# Altium PCB UWB-Anchor_Pcb.PcbDoc
Units mil, origin at the board's own origin, x right, y up, seen from the top; angles counter-clockwise.
Board outline 1732.28 x 1574.8 mil, 2 copper layers (Top Layer, Bottom Layer), stack 49.606 mil thick; 40 components, 51 nets, 199 pads, 125 vias.
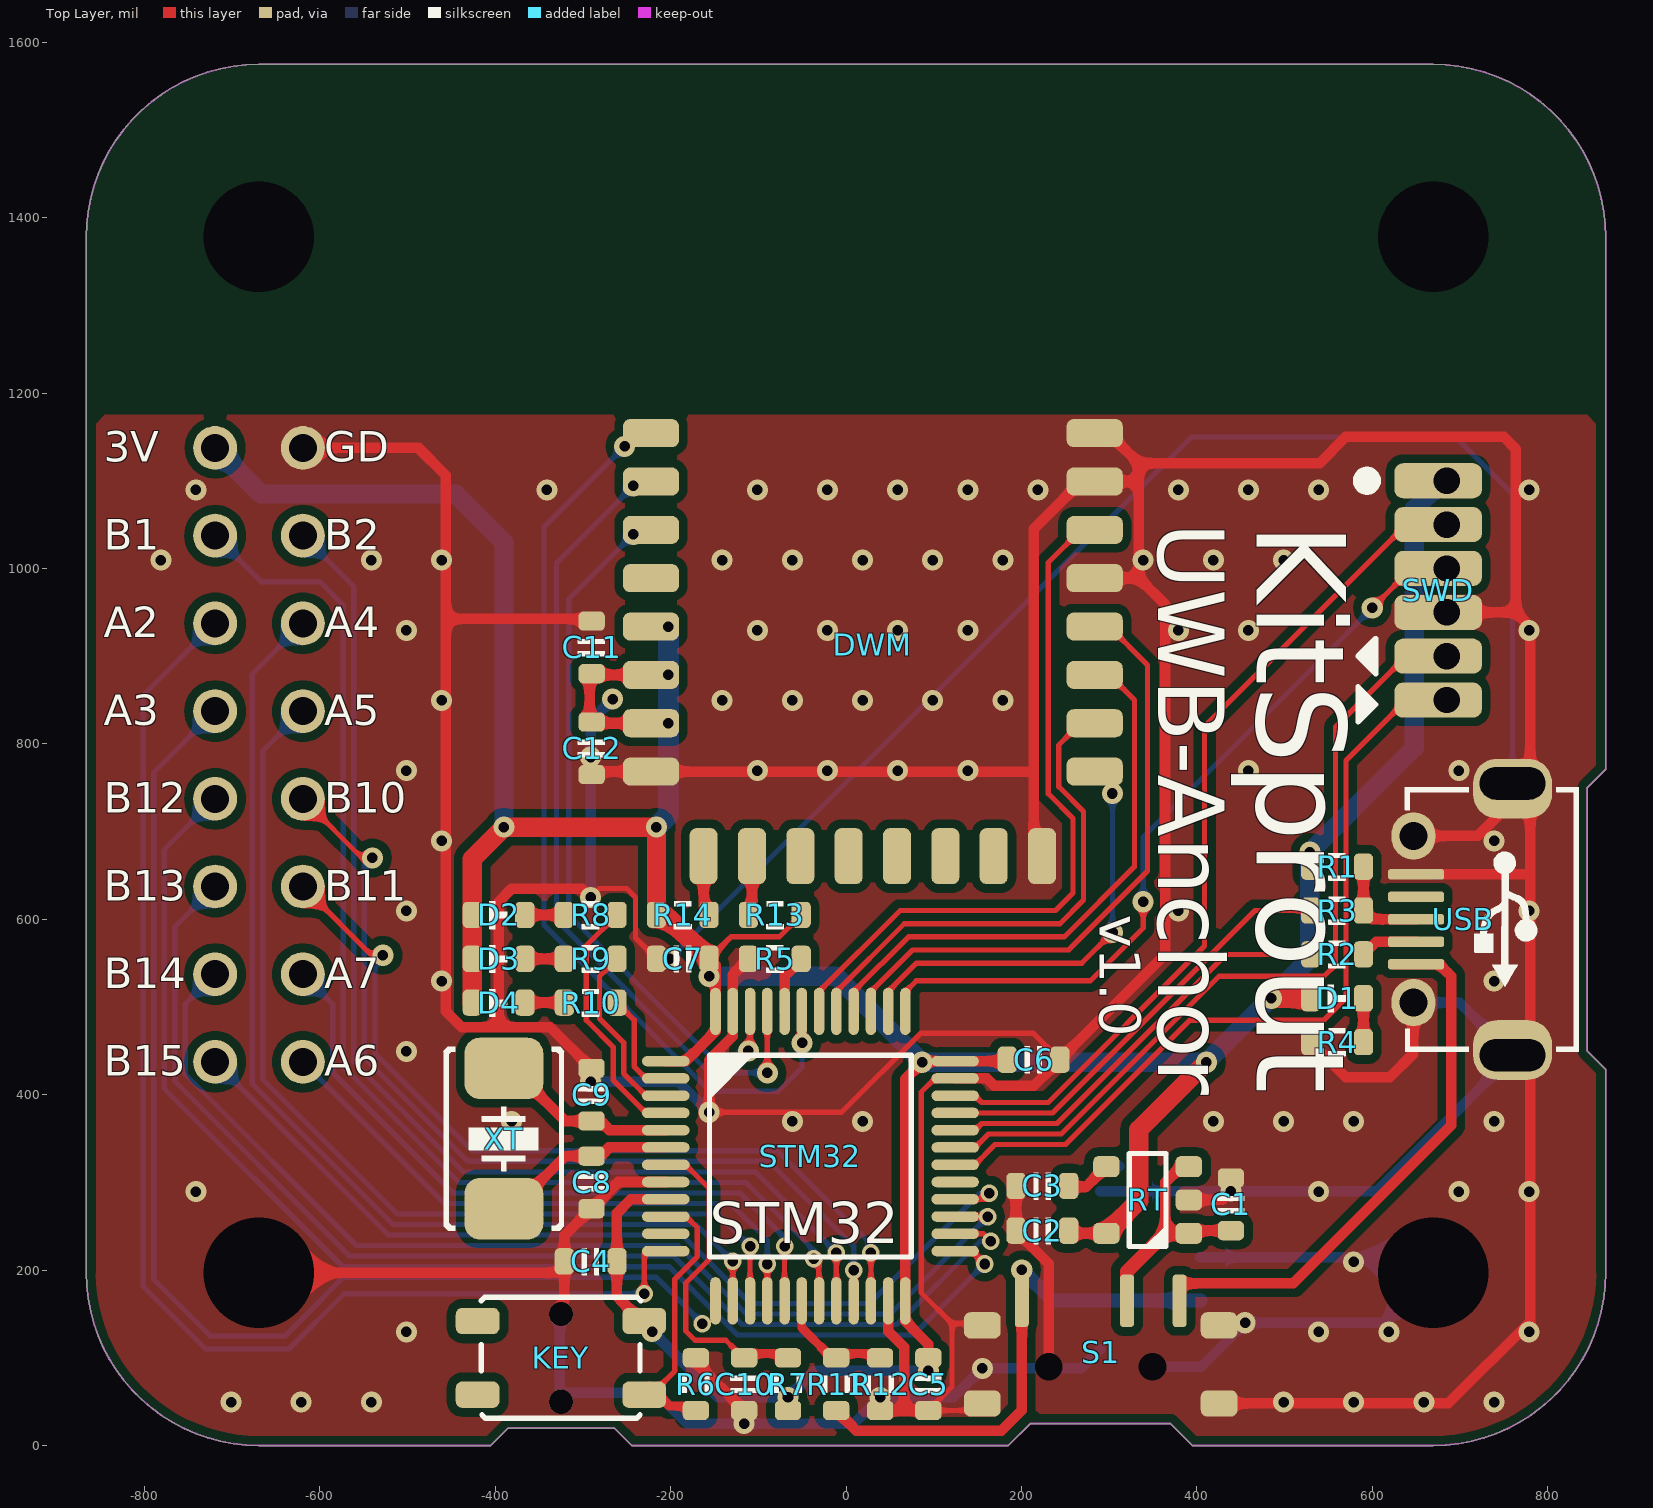
[diagram p0: Top Layer view]
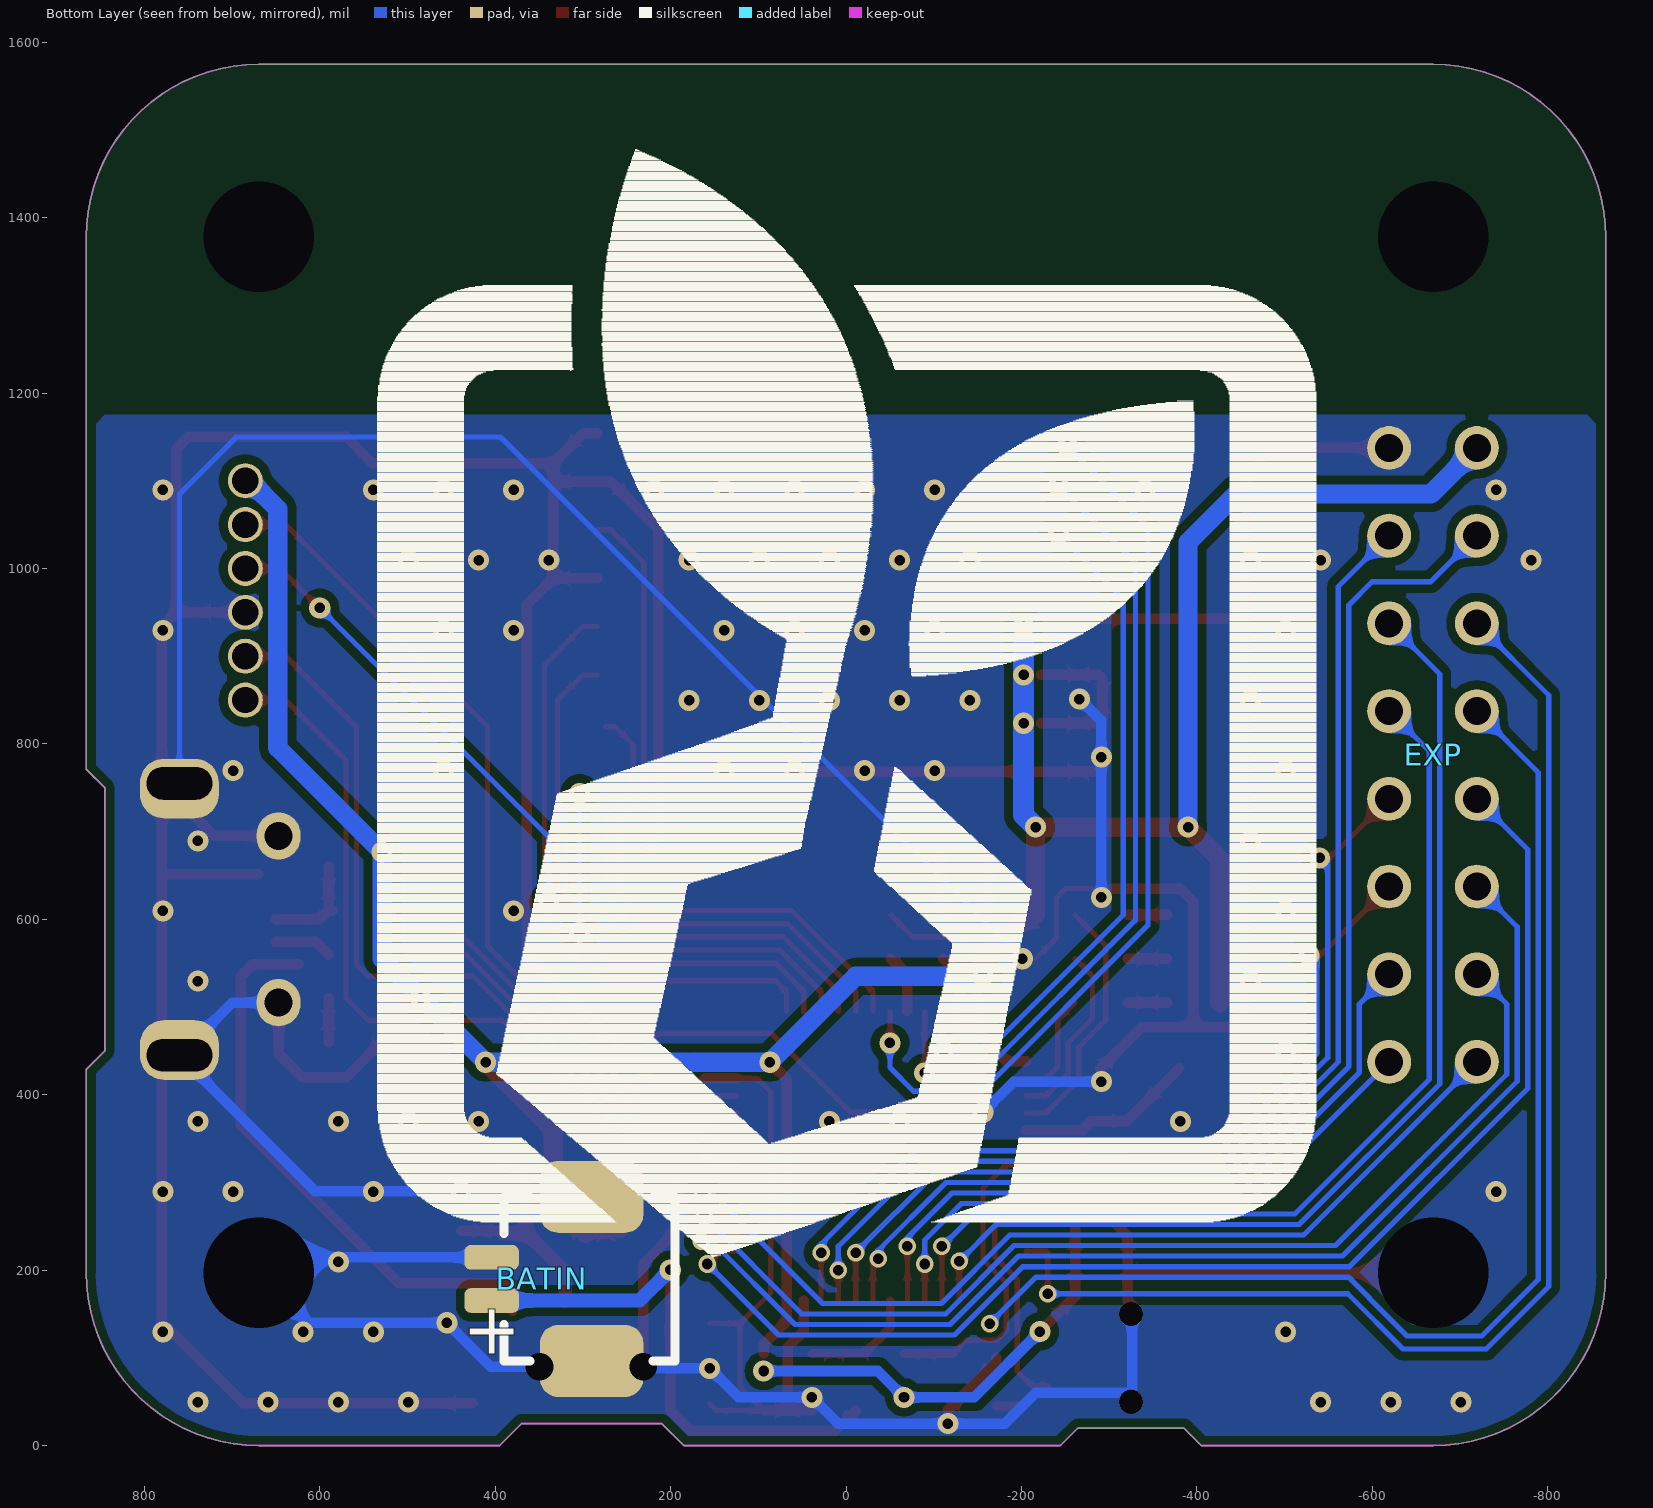
[diagram p1: Bottom Layer view, seen from below]
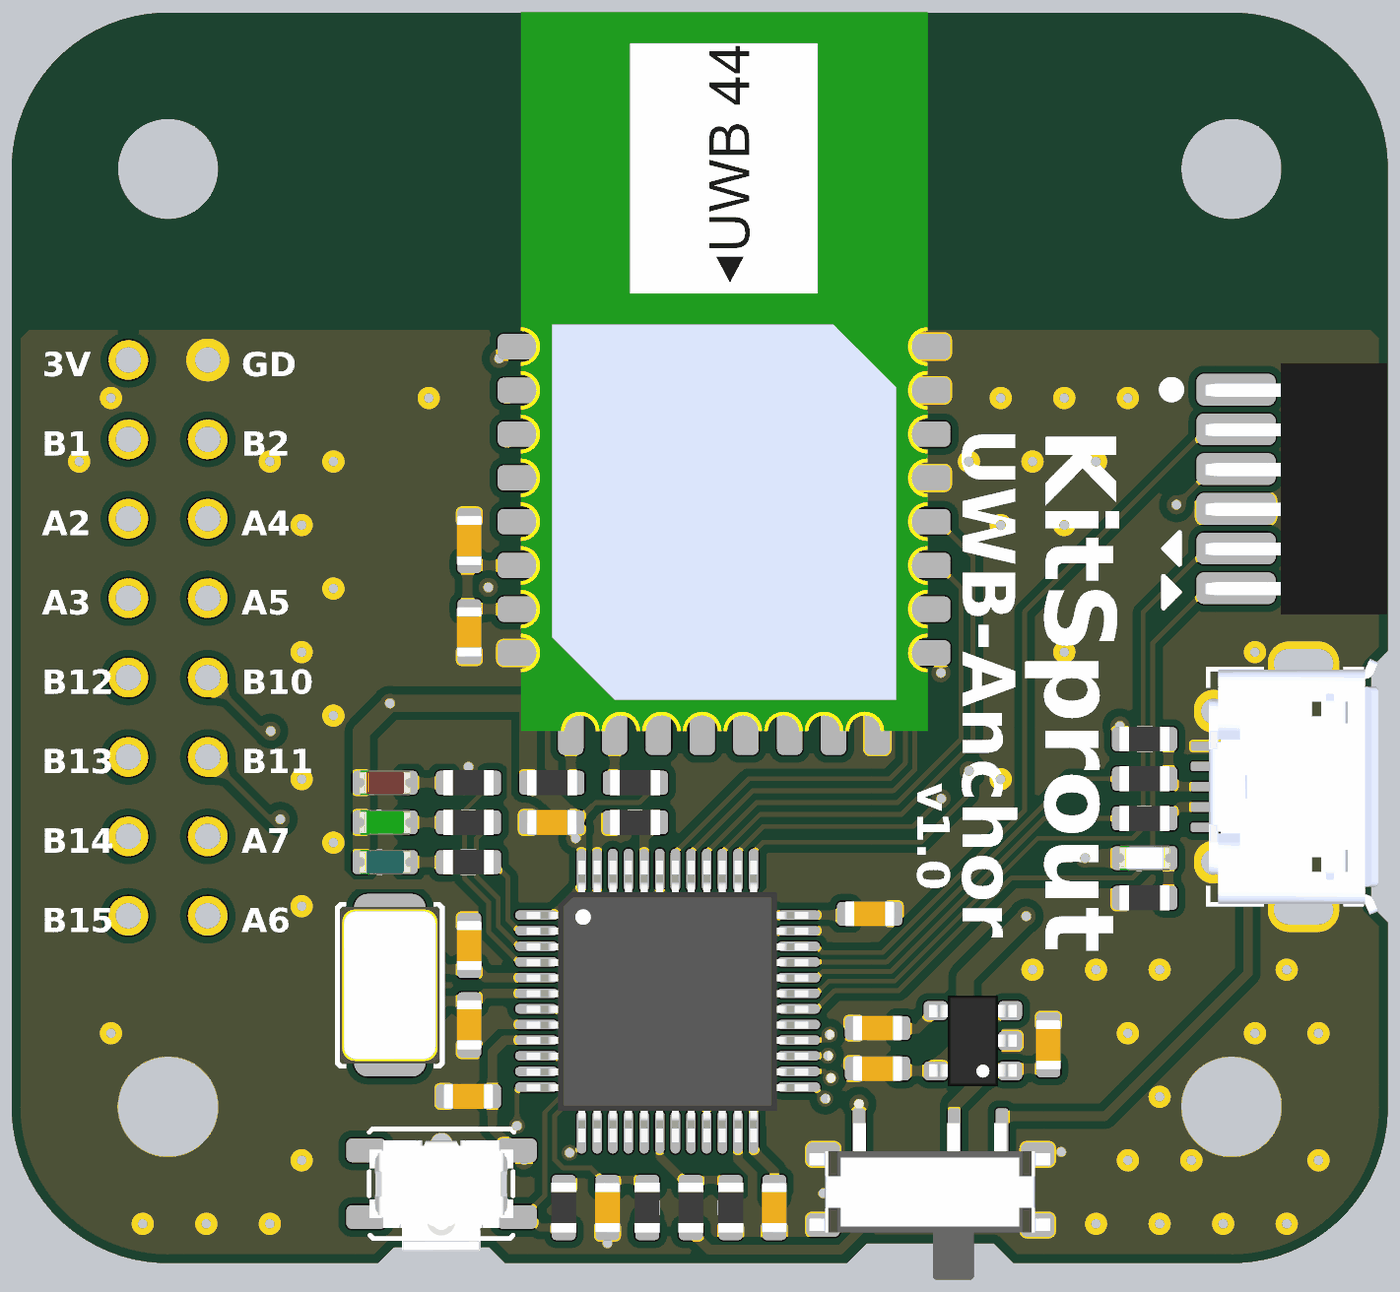
[diagram p2: 3D render of the assembled board from above, using the file's embedded part models]

## Layer stack, top to bottom
Top Solder: solder mask 0.3937, Solder Resist, Dk 3.5
Top Layer: signal copper 1.1811
Dielectric 1: core 47.2441, Dk 4.2
Bottom Layer: signal copper 1.1811
Bottom Solder: solder mask 0.3937, Solder Resist, Dk 3.5

## Board outline
-669.29,0 -405,0 -385,20 -264.45,20 -244.45,0 185,0 210,25 370,25 395,0 669.29,0 ccw(c669.29,196.85) 866.14,196.85 866.14,428.86 845,450 845,750 866.14,771.14 866.14,1377.95 ccw(c669.29,1377.95) 669.29,1574.8 -669.29,1574.8 ccw(c-669.29,1377.95) -866.14,1377.95 -866.14,196.85 ccw(c-669.29,196.85)

## Design rules (kind name [scope] priority, off if disabled: settings)
Clearance "Stitching GND" [IsStitchingVia and InNet('GND') vs (IsVia and (Not IsStitchingVia)) Or IsPad] p1: gap=6
Clearance ClearancePolygon [InPolygon] p2: gap=10
Clearance [All] p3: gap=6
ComponentClearance [All] p1: gap=0 collisioncheckmode=3 verticalgap=0 showdistances=FALSE
Height [All] p1: minheight=0 maxheight=5000 prefheight=500
HoleSize [All] p1: absolutevalues=TRUE maxlimit=200 minlimit=1 maxpercent=80.000 minpercent=20.000
HoleToHoleClearance [All] p1: gap=6 allowstackedmicrovias=TRUE
MinimumSolderMaskSliver [All] p1: minsoldermaskwidth=0
PolygonConnect [All] p1: connectstyle=Direct reliefconductorwidth=10 reliefentries=4 polygonreliefangle="90 Angle" airgapwidth=10
RoutingVias [All] p1: holewidth=12 width=24 viastyle="Through Hole" minholewidth=12 minwidth=16 maxholewidth=28 maxwidth=50
SilkToSilkClearance [All] p1: silktosilkclearance=0
SilkToSolderMaskClearance [IsPad] p1: minsilkscreentomaskgap=0 clearancetoexposedcopper=TRUE
SolderMaskExpansion [All] p1: expansion=2
Width [All] p1: maxlimit=50 minlimit=6 preferedwidth=10
23 further rules are at their usual default settings.

## Components (designator, comment, footprint, x,y, rotation, side; value= is the part's Value field where it differs from the comment)
BATIN "MX1.25_2P" MX1.25_S90_2P 290,190 r90 bottom
C1 "Cap_0603" CAP_0603 438.86,275 r270 top
C2 "Cap_0603" CAP_0603 223.86,245 r0 top
C3 "Cap_0603" CAP_0603 223.86,296 r0 top
C4 "Cap_0603" CAP_0603 -291.14,210 r0 top
C5 "Cap_0603" CAP_0603 93.86,70 r90 top
C6 "Cap_0603" CAP_0603 213.86,440 r180 top
C7 "Cap_0603" CAP_0603 -186.14,555 r0 top
C8 "Cap_0603" CAP_0603 -290.14,300 r270 top
C9 "Cap_0603" CAP_0603 -290.14,400 r90 top
C10 "Cap_0603" CAP_0603 -116.14,70 r90 top
C11 "Cap_0603" CAP_0603 -290,910 r90 top
C12 "Cap_0603" CAP_0603 -290,795 r270 top
D1 "LED_0603" LED_0603_YELLOW 560,510 r0 top
D2 "LED_0603" LED_0603_RED -396.14,605 r0 top
D3 "LED_0603" LED_0603_GREEN -396.14,555 r0 top
D4 "LED_0603" LED_0603_BLUE -396.14,505 r0 top
DWM "DWM1000" DWM1000 30.6,670 r0 top locked
EXP "HDR2x8_2.54" HDR2X8_2.54_180 -619.29,1137.4 r180 bottom locked
KEY "ButtonTACT" ButtonTACT_3.5*3.55_90 -325,100 r180 top locked
R1 "Res_0603" RES_0603 560,660 r0 top
R2 "Res_0603" RES_0603 560,560 r180 top
R3 "Res_0603" RES_0603 560,610 r180 top
R4 "Res_0603" RES_0603 560,460 r0 top
R5 "Res_0603" RES_0603 -81.14,555 r0 top
R6 "Res_0603" RES_0603 -171.14,70 r270 top
R7 "Res_0603" RES_0603 -66.14,70 r270 top
R8 "Res_0603" RES_0603 -291.14,605 r0 top
R9 "Res_0603" RES_0603 -291.14,555 r0 top
R10 "Res_0603" RES_0603 -291.14,505 r0 top
R11 "Res_0603" RES_0603 -11.14,70 r90 top
R12 "Res_0603" RES_0603 38.86,70 r270 top
R13 "Res_0603" RES_0603 -81.14,605 r0 top
R14 "Res_0603" RES_0603 -186.14,605 r180 top
RT "RT9193" SOT23-5 343.86,280 r180 top
S1 "SwitchSPDT_2.8x6.6_90" SwitchSPDT_2.8X6.6_90 290.43,90 r0 top locked
STM32 "STM32F303C" LQFP_P0.5_48 -40.51,330 r0 top locked
SWD "HDR1x6_1.27" HDR1X6_1.27_180HFD 675.12,1100 r0 top
USB "USB_Micro" USB_Micro-AB 750,600 r270 top locked
XT "XTAL_5032_2P" XT_5032_2 -390.14,350 r270 top

## Footprints (in the part's own frame and the unit in brackets; to place one, negate y for a bottom-side part, rotate by r counter-clockwise, add the part's x,y. Pads: shape width x height; smd on the part's side, far side on the other; paste and mask are expansions set on the pad)
ButtonTACT_3.5*3.55_90 [mil]
  round 27.56 hole 27.56 mask+0: 0(-0.01,-50) 0(0,50)
  rrect50% 50x30 smd: 1(-95,42) 2(-95,-42) 3(95,42) 4(95,-42)
  silkscreen extent -91,-69 91,69, body extent -90,-55 91,85, height 56
CAP_0603 [mil]
  rrect50% 22x30 smd: 1(-30,0) 2(30,0)
  silkscreen extent -10,-15 10,15, body extent -31,-16 31,16, height 31
DWM1000 [mil]
  rrect50% 64x32 smd: 1(-253,484.25) 2(-253,429.13) 3(-253,374.02) 4(-253,318.9) 5(-253,263.78) 6(-253,208.66) 7(-253,153.54) 8(-253,98.43) 17(253,98.43) 18(253,153.54) 19(253,208.66) 20(253,263.78) 21(253,318.9) 22(253,374.02) 23(253,429.13) 24(253,484.25)
  rrect50% 32x64 smd: 9(-192.91,2) 10(-137.8,2) 11(-82.68,2) 12(-27.56,2) 13(27.56,2) 14(82.68,2) 15(137.8,2) 16(192.91,2)
  body extent -256,0 256,906, height 114
HDR1X6_1.27_180HFD [mil]
  rrect50% 100x40 smd: 1(0,0) 2(0,-50) 3(0,-100) 4(0,-150) 5(0,-200) 6(0,-250)
  body extent -38,-283 190,33, height 71
HDR2X8_2.54_180 [mil]
  round 50 hole 32: 1(0,0) 2(100,0) 3(0,-100) 4(100,-100) 5(0,-200) 6(100,-200) 7(0,-300) 8(100,-300) 9(0,-400) 10(100,-400) 11(0,-500) 12(100,-500) 13(0,-600) 14(100,-600) 15(0,-700) 16(100,-700)
LED_0603_BLUE [mil]
  rrect50% 22x30 smd: 1(-30,0) 2(30,0)
  silkscreen extent -10,-16 10,16, body extent -32,-16 32,16, height 24
LED_0603_GREEN [mil]
  rrect50% 22x30 smd: 1(-30,0) 2(30,0)
  silkscreen extent -10,-16 10,16, body extent -32,-16 32,16, height 24
LED_0603_RED [mil]
  rrect50% 22x30 smd: 1(-30,0) 2(30,0)
  silkscreen extent -10,-16 10,16, body extent -32,-16 32,16, height 24
LED_0603_YELLOW [mil]
  rrect50% 22x30 smd: 1(-30,0) 2(30,0)
  silkscreen extent -10,-16 10,16, body extent -32,-16 32,16, height 24
LQFP_P0.5_48 [mil]
  oval 54x12 smd: 1(-165,108.27) 2(-165,88.58) 3(-165,68.9) 4(-165,49.21) 5(-165,29.53) 6(-165,9.84) 7(-165,-9.84) 8(-165,-29.53) 9(-165,-49.21) 10(-165,-68.9) 11(-165,-88.58) 12(-165,-108.27) 25(165,-108.27) 26(165,-88.58) 27(165,-68.9) 28(165,-49.21) 29(165,-29.53) 30(165,-9.84) 31(165,9.84) 32(165,29.53) 33(165,49.21) 34(165,68.9) 35(165,88.58) 36(165,108.27)
  oval 12x54 smd: 13(-108.27,-165) 14(-88.58,-165) 15(-68.9,-165) 16(-49.21,-165) 17(-29.53,-165) 18(-9.84,-165) 19(9.84,-165) 20(29.53,-165) 21(49.21,-165) 22(68.9,-165) 23(88.58,-165) 24(108.27,-165) 37(108.27,165) 38(88.58,165) 39(68.9,165) 40(49.21,165) 41(29.53,165) 42(9.84,165) 43(-9.84,165) 44(-29.53,165) 45(-49.21,165) 46(-68.9,165) 47(-88.58,165) 48(-108.27,165)
  silkscreen extent -115,-115 115,115, body extent -177,-178 177,177, height 61
MX1.25_S90_2P [mil]
  rrect50% 82x118 smd: 0(-93.58,0) 0(93.58,0)
  rrect50% 28x62 smd: 1(-24.61,114) 2(24.61,114)
  silkscreen extent -94,-95 94,100, body extent -147,-129 147,135, height 98
RES_0603 [mil]
  rrect50% 22x30 smd: 1(-30,0) 2(30,0)
  silkscreen extent -10,-15 10,16, body extent -31,-16 31,16, height 18
SOT23-5 [mil]
  rrect50% 30x24 smd: 1(-47,38) 2(-47,0) 3(-47,-38) 4(47,-38) 5(47,38)
  silkscreen extent -21,-53 21,53, body extent -55,-57 55,57, height 57
SwitchSPDT_2.8X6.6_90 [mil]
  rrect50% 42x30 smd: 0(-135,-42) 0(-135,47) 0(135,-42) 0(135,47)
  round 10 hole 31.5: 0(-59.06,0) 0(59.06,0)
  rrect50% 16x60 smd: 1(90,75) 2(30,75) 3(-90,75)
  body extent -152,-111 151,86, height 55
USB_Micro-AB [mil]
  rrect80% 68x90 hole 37 slot 75 at 90 deg copper offset 6,0 mask+0: 0(-155,10)
  oval 54x50 hole 32 mask+0: 0(-95,-103) 0(95,-103)
  rrect80% 68x90 hole 37 slot 75 at 90 deg copper offset -6,0 mask+0: 0(155,10)
  rrect50% 12x64 smd: 1(51.18,-100) 2(25.59,-100) 3(0,-100) 4(-25.59,-100) 5(-51.18,-100)
  silkscreen extent -151,-113 151,86, body extent -161,-109 161,104, height 108
XT_5032_2 [mil]
  rrect50% 70x90 smd: 1(-80,0) 2(80,0)
  silkscreen extent -105,-69 104,69, body extent -98,-63 98,63, height 39

## Part data
BATIN: "MX"
C1 C2 C3 C4 C5 C6 C7 C8 C9 C10 C11 C12: "Capacitor"
D1 D2 D3 D4: "LED"
DWM: "Module"
EXP SWD: "Header"
KEY: "Button"
R1 R2 R3 R4 R5 R6 R7 R8 R9 R10 R11 R12 R13 R14: "Resistor"
RT: "Power"
S1: "Switch"
STM32: library part STM32F103C, "MCU"
USB: "USB"
XT: "Crystal Oscillator"

## Free pads (board coordinates)
  round 115 hole 126 paste+0 mask+0: 0(-669.29,196.85) 0(669.29,196.85)
  round 115 hole 126 unplated paste+0 mask+0: 0(-669.29,1377.95) 0(669.29,1377.95)
  round 40 hole 30: 2(684.88,850) 2(684.88,900) 2(684.88,950) 2(684.88,1000) 2(684.88,1050) 2(684.88,1100)

## Via types
v1: diameter 24, hole 12, Top Layer to Bottom Layer, 74 vias
v2: diameter 24, hole 12, Top Layer to Bottom Layer, tented both sides, 37 vias
v3: diameter 20, hole 12, Top Layer to Bottom Layer, tented both sides, 14 vias

## Nets (pads, with @x,y where several pads share a name; then routed paths per layer and width w, separated by ;. In a path a pad name is that pad's centre, name@x,y a point inside that pad or via, vN(x,y) a via of type N, cw(c..) or ccw(c..) an arc to the next point about the centre after c; other vN are vias at no path point)
3V3: C2.2 C4.2 C5.2 C6.2 C7.2 C11.1 C12.1 D1.1 D2.1 D3.1 D4.1 DWM.5 DWM.6 DWM.7 EXP.2 KEY.2 pad.2@684.88,1100 R1.1 R7.2 R13.2 R14.2 RT.5 STM32.1 STM32.9 STM32.24 STM32.36 STM32.48 SWD.1 | length 4699.4
  Top Layer w6: C7.2 -131.14,580 -76.14,580 R13.2
  Top Layer w12: KEY.2@-231.57,140.43 -261.14,170 C4.2 -261.14,265 -245.35,280.79 STM32.9 ; DWM.7 -287.4,823.54 -292.4,828.54 -292.4,873.66 -287.4,878.66 DWM.6 ; STM32.1 -182.87,438.27 -148.78,472.36 STM32.48 -148.78,547.64 C7.2 ; v2@83.86,438.27 STM32.36 182.13,438.27 C6.2 ; v2(86.86,437) 67.76,417.9 STM32.24 67.76,141.56 93.86,115.46 C5.2@93.86,105 ; C2.2 256.86,242 RT.5
  Top Layer w22: D4.1 D3.1 D2.1 -426.14,668.86 v2(-390,705) v2(-216.14,705) R14.2@-216.14,615 ; R14.2 R14.2@-216.14,615 ; C7.2 R14.2@-216.14,615 ; RT.5 333.86,279 333.86,360 v2(410.86,437) ; v2(485,510) D1.1@525,510
  Bottom Layer w12: v2(-221.14,130) -146.14,55 v2(-66.14,55) -36.14,85 v2(93.86,85)
  Bottom Layer w22: EXP.2 -666.89,1085 -445,1085 -390,1030 v2(-390,705) ; v2(-156.14,535) -11.14,535 v2(86.86,437) v2(410.86,437) 528.86,555 v2(528.86,676.53) 647.88,795.56 647.88,1067.88 pad.2@682.44,1102.44
  Bottom Layer w24: v2(-216.14,705) -202.4,718.74 v2(-202.4,823.54) v2(-202.4,878.66) v2(-202.4,933.78)
5V: S1.1 USB.1 | length 657.6
  Top Layer w12: S1.1@380.43,153.42 S1.1 380.43,185 510,185 690,365 690,535 676.18,548.82 USB.1 USB.1@623.82,548.82
BOOT0: R5.2 STM32.44 | length 67.8
  Top Layer w12: STM32.44 -70.04,536.1 R5.2
D_CS: DWM.17 STM32.38 | length 464.8
  Top Layer w6: STM32.38 48.07,517.53 80.54,550 268.86,550 v2(303.86,585)
  Bottom Layer w6: v2(303.6,743.43) 303.86,743.17 v2(303.86,585)
D_EXTON: DWM.1 STM32.43 | length 1031.7
  Top Layer w6: STM32.43 -50.35,459.21 v2(-50.14,459)
  Bottom Layer w6: v2(-252.4,1139.25) -344.24,1047.42 -344.24,593.36 -154.87,404 -77.14,404 -50.14,431 v2(-50.14,459)
D_IRQ: DWM.22 STM32.42 | length 815.5
  Top Layer w6: STM32.42 -30.67,517.53 61.8,610 238.86,610 258.86,630 258.86,715 230.6,743.26 230.6,1006.74 267.87,1044.02 DWM.22
D_PHA: DWM.9 R14.1 | length 69.6
  Top Layer w12: DWM.9 -162.31,611.17 R14.1
D_POL: DWM.10 R13.1 | length 68.6
  Top Layer w12: R13.1 -107.2,608.94 DWM.10
D_RST: DWM.3 STM32.46 | length 775.6
  Top Layer w6: v2@-109.41,450 STM32.46
  Bottom Layer w6: v2(-242.4,1039.02) -316.14,965.28 -316.14,605 -156.14,445 v2@-116.41,445
  other v2: -111.41,450
D_SCK: DWM.20 STM32.39 | length 708.3
  Top Layer w6: STM32.39 28.39,517.53 75.86,565 253.86,565 343.86,655 343.86,890 300.08,933.78 DWM.20
D_SDI: DWM.18 STM32.41 | length 575.9
  Top Layer w6: STM32.41 -10.98,517.53 66.49,595 243.86,595 270.86,622 270.86,723 242.6,751.26 242.6,798.74 263.35,819.49 DWM.18@273.86,819.49
D_SDO: DWM.19 STM32.40 | length 648.8
  Top Layer w6: STM32.40 8.7,517.53 71.17,580 248.86,580 328.86,660 328.86,850 300.2,878.66 DWM.19
D_WAKE: DWM.2 STM32.45 | length 913.8
  Top Layer w6: v2(-89.72,425) STM32.45
  Bottom Layer w6: v2(-242.4,1094.13) -330.09,1006.44 -330.09,599.22 -155.87,425 v2(-89.72,425)
GND: BATIN.0 BATIN.2 C1.1 C2.1 C3.1 C4.1 C5.1 C6.1 C7.1 C8.2 C9.2 C10.1 C11.2 C12.2 DWM.8 DWM.16 DWM.21 DWM.23 DWM.24 EXP.1 KEY.0 pad.0@669.29,196.85 pad.0@-669.29,196.85 pad.2@684.88,950 R4.1 R5.1 R6.1 R12.2 RT.2 S1.0 STM32.8 STM32.23 STM32.35 STM32.47 SWD.4 USB.0 USB.5 | length 12287.7
  Top Layer w6: v2(-291.14,625) -281.14,635 -250,635 -240,625 -240,578.86 C7.1 ; v2(-156.14,380) -5.03,380 84.97,470 213.86,470 C6.1 ; STM32.35 101.44,418.58 85.86,403 85.86,174.14 120.86,139.14 ; S1.0@155.43,48 147.43,40 C5.1 120.86,67 120.86,139.14 ; S1.0@155.43,139.14 120.86,139.14
  Top Layer w12: pad.0@-669.29,196.85 C4.1@-321.14,196.85 ; EXP.1 -487.4,1137.4 -456.14,1106.14 -456.14,942.5 ; KEY.0@-326.14,160 -321.14,165 C4.1@-321.14,196.85 ; C11.2@-292.5,942.5 -456.14,942.5 ; v2@-292.4,786.26 -292.4,768.54 C12.2@-292.28,768.43 ; v2(-291.14,625) -301.14,635 -381.36,635 -396.14,620.22 -396.14,477 ; C9.2 -337.14,477 -396.14,477 ; C12.2@-287.28,768.43 DWM.8 212.28,768.43 213.86,770 ; STM32.8 -259.67,300.47 C8.2 -321.14,239 C4.1 C4.1@-321.14,196.85 ; R6.1 -171.14,95 C10.1 ; v2(-156.14,380) -156.14,439.54 -129.09,466.59 STM32.47 -129.09,537.05 R5.1 ; R12.2 66.36,40 ; STM32.23 48.07,130.54 66.36,112.25 66.36,40 ; C5.1 66.36,40 ; STM32.35 160.28,418.58 168.86,410 213.86,410 C6.1 363.86,560 363.86,958.9 333.86,988.9 ; C3.1 C2.1 231.38,207.48 S1.0@231.38,90 ; DWM.16 223.51,685.35 213.86,695 213.86,770 ; DWM.21 333.86,988.9 ; DWM.24 299.61,1154.25 333.86,1120 ; RT.2 428.86,280 v2(438.86,290) ; S1.0@425.43,48 686.86,48 780.12,141.26 780.12,651.18 ; R4.1 570,420 620,420 647,447 USB.0@647,505 ; USB.0@667.12,695 720.12,695 USB.0@780.12,755 ; USB.5@670.12,651.18 780.12,651.18 ; pad.2@670.12,950 SWD.4 684.88,950 763.86,950 ; -456.14,942.5 -456.14,495.25 -437.89,477 -396.14,477 ; 213.86,770 213.86,1045 267.99,1099.13 DWM.23 333.86,1099.13 ; 333.86,988.9 333.86,1099.13 ; 333.86,1099.13 333.86,1120 ; 333.86,1120 540,1120 570,1150 750,1150 763.86,1136.14 763.86,950 ; 763.86,950 780.12,933.74 USB.0@780.12,755 ; 780.12,651.18 USB.0@780.12,755
  Bottom Layer w6: v2(-201.14,555) 393.86,1150 695,1150 760,1085 USB.0@760,755
  Bottom Layer w12: KEY.0@-326.15,150 -326.15,60 -216.14,60 -181.14,25 v2(-116.14,25) 8.86,25 v2(38.86,55) 122.43,55 v2(155.43,88) 268,88 BATIN.0@290,110 ; v2(-291.14,415) -191.14,415 v2(-156.14,380) ; v2(-291.14,625) v2(-291.14,785) -291.14,826.2 -266.24,851.1 v2(-266.14,851) ; BATIN.0@290,290 v2(438.86,290) 605,290 760,445 700,505 USB.0@647,505 ; BATIN.0@290,318.58 BATIN.0@311.42,318.58 ; S1.0@349.49,90 405,90 v2(455,140) 612.44,140 669.29,196.85 651.54,214.61 BATIN.2
  other v1: -701.14,49.49 -621.14,49.49 -541.14,49.49 498.86,49.49 578.86,49.49 658.86,49.49 738.86,49.49 -501.14,129.49 538.86,129.49 618.86,129.49 778.86,129.49 578.86,209.49 -741.14,289.49 538.86,289.49 698.86,289.49 778.86,289.49 -381.14,369.49 -61.14,369.49 18.86,369.49 418.86,369.49 498.86,369.49 578.86,369.49 738.86,369.49 -501.14,449.49 -461.14,529.49 738.86,529.49 -501.14,609.49 378.86,609.49 778.86,609.49 -461.14,689.49 738.86,689.49 -501.14,769.49 -101.14,769.49 -21.14,769.49 58.86,769.49 138.86,769.49 458.86,769.49 698.86,769.49 -461.14,849.49 -141.14,849.49 -61.14,849.49 18.86,849.49 98.86,849.49 178.86,849.49 -501.14,929.49 -101.14,929.49 -21.14,929.49 58.86,929.49 138.86,929.49 378.86,929.49 458.86,929.49 778.86,929.49 -781.14,1009.49 -541.14,1009.49 -461.14,1009.49 -141.14,1009.49 -61.14,1009.49 18.86,1009.49 98.86,1009.49 178.86,1009.49 338.86,1009.49 418.86,1009.49 498.86,1009.49 -741.14,1089.49 -341.14,1089.49 -101.14,1089.49 -21.14,1089.49 58.86,1089.49 138.86,1089.49 218.86,1089.49 378.86,1089.49 458.86,1089.49 538.86,1089.49 778.86,1089.49
KEY: KEY.1 R6.2 STM32.10 | length 320.9
  Top Layer w6: KEY.1@-231.15,68 -224.14,68 -212,68 -195.14,84.86 -195.14,189.86 -169.51,215.49 -169.51,248.37 -182.24,261.1 STM32.10
  Top Layer w10: KEY.1@-224.14,68 -201.14,45 R6.2@-171.14,45
LED_B: R10.2 STM32.2 | length 122.7
  Top Layer w6: R10.2 -241.51,485.37 -241.51,432.05 -228.04,418.58 STM32.2
LED_G: R9.2 STM32.3 | length 208.9
  Top Layer w6: R9.2 -281.14,535 -281.14,486.97 -253.51,459.34 -253.51,424.37 -228.04,398.9 STM32.3
LED_R: R8.2 STM32.4 | length 291
  Top Layer w6: R8.2 -296.14,570 -296.14,485 -265.51,454.37 -265.51,416.68 -228.04,379.21 STM32.4
NetC3_2: C3.2 RT.4 | length 52.5
  Top Layer w12: C3.2@253.86,295 273.86,295 RT.4
NetD1_2: D1.2 R4.2 | length 50
  Top Layer w12: R4.2 D1.2
NetD2_2: D2.2 R8.1 | length 45
  Top Layer w12: D2.2 R8.1
NetD3_2: D3.2 R9.1 | length 45
  Top Layer w12: D3.2 R9.1
NetD4_2: D4.2 R10.1 | length 45
  Top Layer w12: D4.2 R10.1
NetR1_2: R1.2 R3.1 USB.3 | length 119.1
  Top Layer w12: R3.1@585,610 R3.1 ; R1.2 R3.1 ; USB.3 600,600 R3.1
NetR2_1: R2.1 USB.2 | length 66
  Top Layer w12: R2.1 604.41,574.41 USB.2
PA2: EXP.6 STM32.12 | length 1484.2
  Top Layer w6: v3(-230,173) -230,220 -228.27,221.73 STM32.12@-213.27,221.73 ; STM32.12@-208.27,221.73 STM32.12
  Bottom Layer w6: EXP.6 -801.29,855.4 -801.29,181.29 -730,110 -635,110 -572,173 v3(-230,173)
PA3: EXP.8 STM32.13 | length 1379.5
  Bottom Layer w6: EXP.8 -789.29,767.4 -789.29,189.29 -724.85,124.85 -639.47,124.85 -597.29,167.03 -597.29,167.71 -573,192 -216.78,192 v3(-163.78,139)
PA4: EXP.5 STM32.14 | length 1215.7
  Top Layer w6: STM32.14 -129.09,200
  Bottom Layer w6: EXP.5 -677.02,879.67 -677.02,412.37 -516.65,252 -171.09,252 v3(-129.09,210)
PA5: EXP.7 STM32.15 | length 1128.4
  Top Layer w6: STM32.15 v3@-109.41,220
  Bottom Layer w6: EXP.7 -665,791.69 -665,417.35 -511.65,264 -146.41,264 v3(-109.41,227)
PA6: EXP.15 STM32.16 | length 675.9
  Top Layer w6: STM32.16 v3@-89.72,200
  Bottom Layer w6: EXP.15 -457.89,276 -131.54,276 -89.72,234.19 v3(-89.72,207)
PA7: EXP.13 STM32.17 | length 781.5
  Top Layer w6: STM32.17 v3@-70.04,220
  Bottom Layer w6: EXP.13 -585.29,503.4 -585.29,425.29 -448,288 -121,288 v3@-65.02,232.02
  other v3: -70.04,227
PB1: EXP.4 STM32.19 | length 1386.2
  Top Layer w6: STM32.19 v3@-30.67,215
  Bottom Layer w6: EXP.4 -666.89,985 -600,985 -573.29,958.29 -573.29,432.38 -440.91,300 -114,300 v3@-31,217
  other v3: -36.67,213
PB2: EXP.3 STM32.20 | length 1319.4
  Top Layer w6: STM32.20 v3(-10.98,220)
  Bottom Layer w6: EXP.3 -561.29,979.4 -561.29,437.35 -435.94,312 -102.98,312 v3(-10.98,220)
PB10: EXP.9 STM32.21 | length 1039.9
  Top Layer w6: EXP.9 v2@-546.44,664.56 ; STM32.21 v3(8.7,200)
  Bottom Layer w6: v2@-549.14,670 -549.14,442.17 -430.97,324 -88.11,324 8.7,227.19 v3(8.7,200)
  other v2: -540,670
PB11: EXP.11 STM32.22 | length 949.6
  Top Layer w6: EXP.11 v2@-534.44,552.56 ; STM32.22 v3(28.39,220)
  Bottom Layer w6: v2@-537.14,559 -537.14,447.14 -426,336 -78.14,336 v3@33.39,224.47
  other v2: -528,559
PB12: EXP.10 STM32.25 | length 1479.1
  Top Layer w6: STM32.25 143.27,221.73 v3(158,207)
  Bottom Layer w6: EXP.10 -777.29,679.4 -777.29,407.29 -574,204 -201.65,204 -123.65,126 77,126 v3(158,207)
PB13: EXP.12 STM32.26 | length 1369.7
  Top Layer w6: STM32.26 156.58,241.42 v3(165,233)
  Bottom Layer w6: EXP.12 -765.29,591.4 -765.29,415.29 -566,216 -196.68,216 -118.68,138 58,138 153,233 v3(165,233)
PB14: EXP.14 STM32.27 | length 1239.2
  Top Layer w6: STM32.27 v3(161.49,261.1)
  Bottom Layer w6: EXP.14 -753.29,503.4 -753.29,423.29 -558,228 -191.71,228 -113.71,150 50.39,150 v3(161.49,261.1)
PB15: EXP.16 STM32.28 | length 1090.9
  Top Layer w6: STM32.28 156.49,280.79 v3(163.49,287.79)
  Bottom Layer w6: EXP.16 -521.89,240 -186.74,240 -108.74,162 27,162 152.79,287.79 v3(163.49,287.79)
RST: C10.2 R7.1 STM32.7 | length 361.4
  Top Layer w6: STM32.7 -182.98,320.16 -156.14,293.32 -156.14,211.89 -182.78,185.25 -182.78,130.78 -172,120 -137.14,120 C10.2@-122.14,105
  Top Layer w10: C10.2@-122.14,105 R7.1@-66.14,105
SWC: pad.2@684.88,1000 STM32.37 SWD.3 | length 900.3
  Top Layer w6: STM32.37 67.76,517.53 80.23,530 278.86,530 338.86,590 v2(338.86,620) ; v2(600,955) 645,1000 SWD.3 pad.2@684.88,1000
  Bottom Layer w6: v2(338.86,620) 338.86,693.86 v2(600,955)
SWD: pad.2@684.88,1050 STM32.34 SWD.2 | length 967.3
  Top Layer w6: STM32.34 147.02,398.9 154.7,391.21 230.58,391.21 408.86,569.49 408.86,820 SWD.2@638.86,1050 ; SWD.2@640,1050 pad.2@670.12,1050
U1_RX: pad.2@684.88,900 STM32.31 SWD.5 | length 935.3
  Top Layer w6: STM32.31 147.02,339.84 162.39,355.21 245.49,355.21 425.28,535 545,535 558,548 558,819.14 SWD.5@638.86,900 ; SWD.5@640,900 pad.2@670.12,900
U1_TX: pad.2@684.88,850 STM32.30 SWD.6 | length 922.8
  Top Layer w6: STM32.30 147.02,320.16 170.07,343.21 250.46,343.21 392.25,485 545,485 570,510 570,781.14 SWD.6@638.86,850 ; SWD.6@640,850 pad.2@670.12,850
U_DM: R2.2 STM32.32 | length 488.6
  Top Layer w6: STM32.32 147.02,359.53 154.7,367.21 240.52,367.21 433.31,560 R2.2
U_DP: R3.2 STM32.33 | length 501.1
  Top Layer w6: STM32.33 235.55,379.21 466.33,610 R3.2
VB: BATIN.1 R11.1 S1.3 | length 593.5
  Top Layer w12: R11.1 11.86,17 177,17 200.43,40.43 S1.3 S1.3@200.43,185
  Bottom Layer w16: v2(200.39,200.39) 235.39,165.39 BATIN.1
VBAT: R11.2 R12.1 STM32.18 | length 132.1
  Top Layer w10: STM32.18 -50.35,134.21 -21.14,105 R12.1@38.86,105
VIN: C1.2 RT.1 RT.3 S1.2 | length 263.7
  Top Layer w12: 363.86,242 363.86,300 381.86,318 RT.3 ; RT.1 393.86,245 C1.2
  Top Layer w16: S1.2 320.43,198.57 363.86,242 RT.1
XT_I: C9.1 STM32.5 XT.1 | length 203.8
  Top Layer w12: XT.1@-380.14,430 -320.14,370 C9.1 -280.14,370 -269.67,359.53 STM32.5
XT_O: C8.1 STM32.6 XT.2 | length 203.6
  Top Layer w12: XT.2@-380.14,270 -320.14,330 C8.1 -280.14,330 -270.3,339.84 STM32.6
pads on no net: DWM.4 DWM.11 DWM.12 DWM.13 DWM.14 DWM.15 KEY.3 KEY.4 STM32.11 STM32.29 USB.4

## Polygon pours and split planes (outlines as drawn)
no net on Keep-Out Layer "NONET_L01_P-001" (none, remove dead copper): -669.29,0 -405,0 -385,20 -264.45,20 -244.45,0 185,0 210,25 370,25 395,0 669.29,0 ccw(c669.29,196.85) 866.14,196.85 866.14,428.86 845,450 845,750 866.14,771.14 866.14,1377.95 ccw(c669.29,1377.95) 669.29,1574.8 -669.29,1574.8 ccw(c-669.29,1377.95) -866.14,1377.95 -866.14,196.85 ccw(c-669.29,196.85)
GND on Top Layer "GND_L01_P003" (solid, remove dead copper, pour order 3): -669.29,0 -405,0 -385,20 -264.45,20 -244.45,0 185,0 210,25 370,25 395,0 669.29,0 ccw(c669.29,196.85) 866.14,196.85 866.14,428.86 845,450 845,750 866.14,771.14 866.14,1377.95 ccw(c669.29,1377.95) 669.29,1574.8 -669.29,1574.8 ccw(c-669.29,1377.95) -866.14,1377.95 -866.14,196.85 ccw(c-669.29,196.85)
GND on Bottom Layer "GND_L02_P004" (solid, remove dead copper, pour order 4): -669.29,0 -405,0 -385,20 -264.45,20 -244.45,0 185,0 210,25 370,25 395,0 669.29,0 ccw(c669.29,196.85) 866.14,196.85 866.14,428.86 845,450 845,750 866.14,771.14 866.14,1377.95 ccw(c669.29,1377.95) 669.29,1574.8 -669.29,1574.8 ccw(c-669.29,1377.95) -866.14,1377.95 -866.14,196.85 ccw(c-669.29,196.85)

## Other copper
Multi-Layer:
  pour cut-out: -866.14,1153.86 -866.14,1377.95 cw(c-669.29,1377.95) -669.29,1574.8 669.29,1574.8 cw(c669.29,1377.96) 866.14,1377.95 866.14,1153.86 845,1175 -845,1175

## Silkscreen, mask and mechanical layers (free items; w line width, h text height)
Top Overlay:
  circle w16: c593.86,1100 r8
  region: 583.86,900 603.86,920 603.86,880
  region: 603.86,845 583.86,825 583.86,865
  lines w6: 583.86,825 583.86,865 603.86,845 583.86,825 ; 583.86,900 603.86,880 603.86,920 583.86,900
  text "3V" at -846.14,1110 h60
  text "GD" at -595,1110 h60
  text "UWB-Anchor" at 330.86,1052 h130 r270
  text "KitSprout" at 434.86,1052 h175 r270
  text "B1" at -846.14,1010 h60
  text "B2" at -595,1010 h60
  text "A2" at -846.14,910 h60
  text "A4" at -595,910 h60
  text "A3" at -846.14,810 h60
  text "A5" at -595,810 h60
  text "B12" at -846.14,710 h60
  text "B10" at -595,710 h60
  text "B13" at -846.14,610 h60
  text "B11" at -595,610 h60
  text "v1.0" at 273.86,605 h80 r270
  text "B14" at -846.14,510 h60
  text "A7" at -595,510 h60
  text "B15" at -846.14,410 h60
  text "A6" at -595,410 h60
  text "STM32" at -155.51,215 h80
Bottom Overlay:
  drawing of 3459 lines, arcs and shapes, not listed
  text "+" at 370,85 h100
Mechanical 1:
  the board outline again, w2
T-Component:
  circle w2: c-669.29,1377.95 r130.98
  circle w2: c-669.29,1377.95 r196.85
  circle w2: c669.29,1377.95 r196.85
  circle w2: c669.29,1377.95 r130.98
  circle w2: c-669.29,196.85 r130.98
  circle w2: c-669.29,196.85 r196.85
  circle w2: c669.29,196.85 r196.85
  circle w2: c669.29,196.85 r130.98